# EAGLE board dis12824d_v1 (EAGLE 9.5.1)
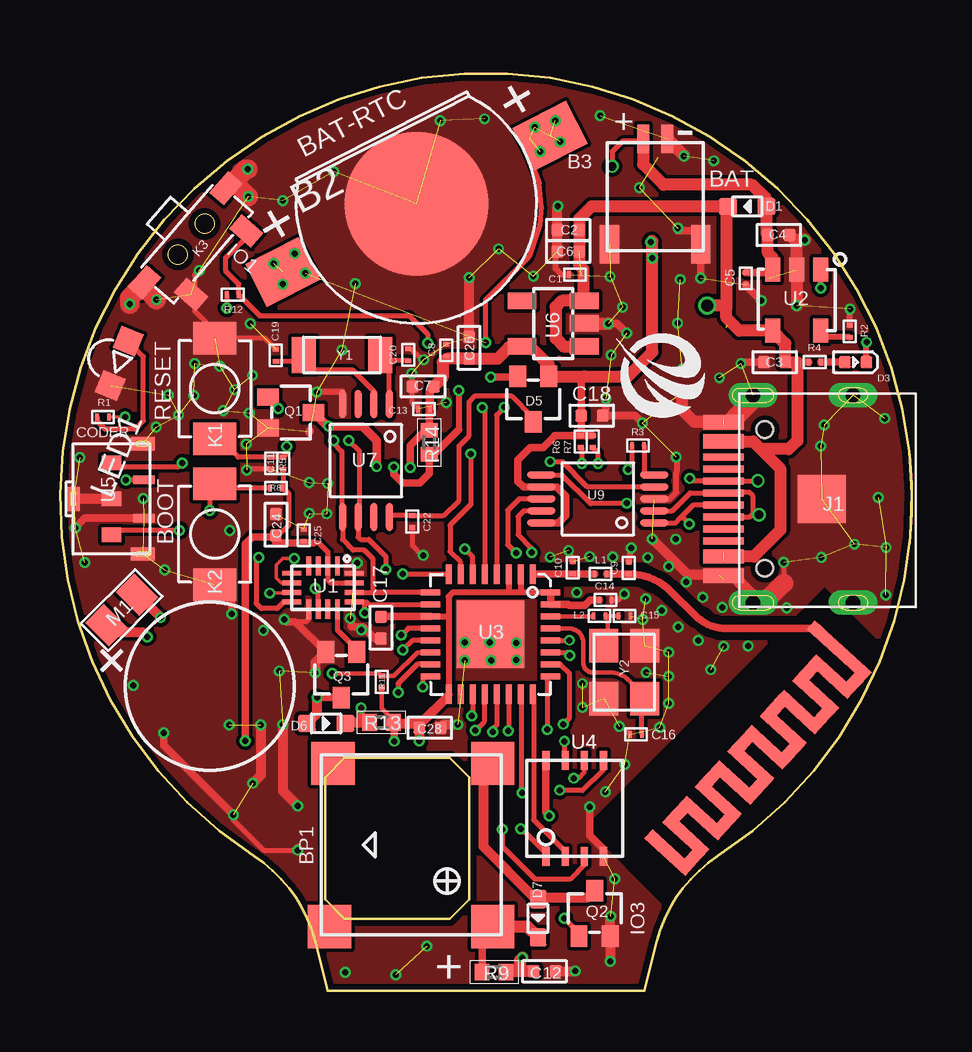
[diagram p0: board, top side]
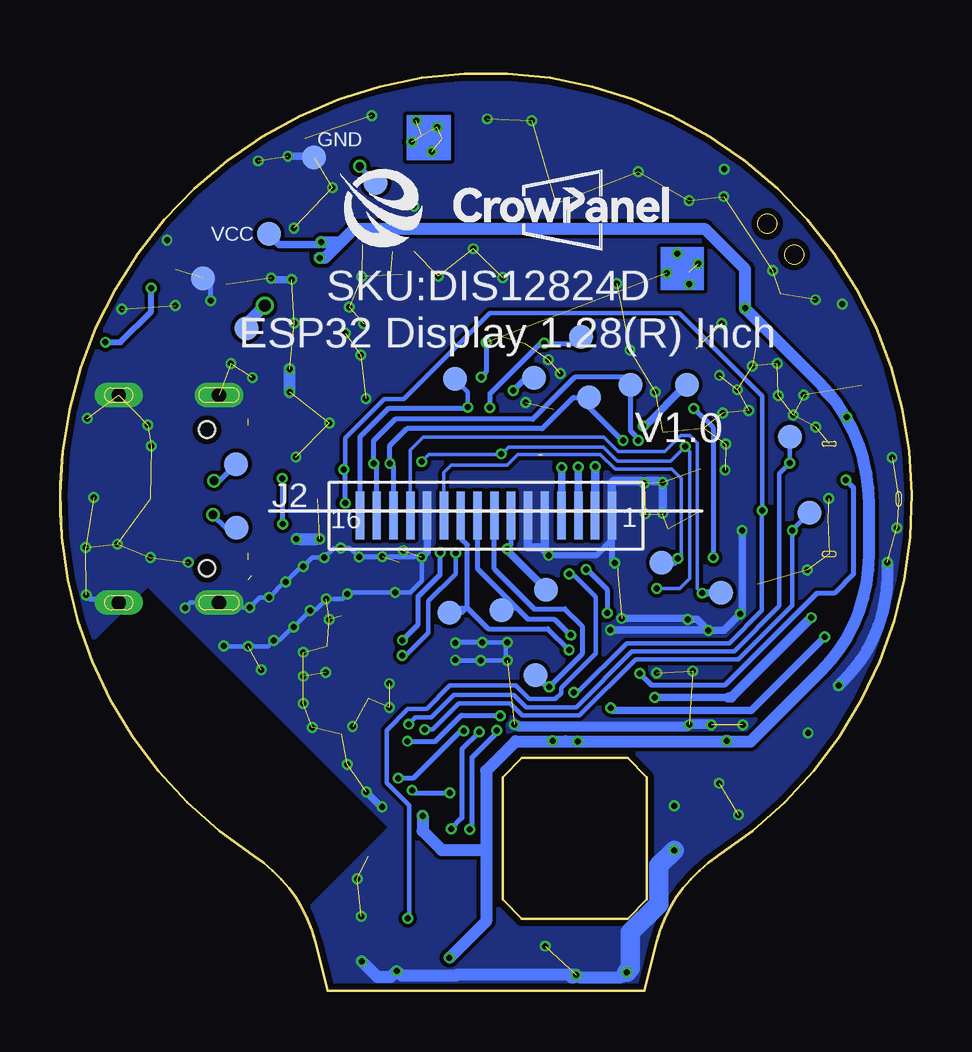
[diagram p1: board, bottom side, seen from below]

Size 35.5 x 38.23 mm. Coordinates in mm from the lower left corner, seen from the top.
Outline: 35.4,18.65 arc12 35.4,22.34
Outline: 11.15,0 24.35,0 24.86,2.05 arc-43 27.41,5.61 arc294 8.08,5.61 arc-43 10.63,2.05 11.15,0
Outline: 11.85,3 16.25,3 17.05,3.8 17.05,8.9 16.25,9.7 11.85,9.7 11.05,8.9 11.05,3.8 11.85,3
Copper layers (1*16): Top 0.035mm / dielectric 1.5mm / Bottom 0.035mm
Design rules "default *": minimum track width 6mil, minimum drill 0.35mm, track to track 6mil, track to pad 6mil, pad to pad 6mil, via to via 6mil, smd to smd 6mil, copper to edge 10mil, drill to drill 6mil, minimum pad ring 4mil, minimum via ring 4mil, stop-mask expansion 4mil, vias tented up to drill 10mil, thermal gap 10mil
tRestrict: 15 lines

## Footprints (pad centres in the part's own frame; a part is rotated, then mirrored left to right if it is on the bottom)
ANT-2.4G_1 = smd 0.5 x 3.2: 1 0,1.6 | smd 0.5 x 2.2: P$1 1,2.1; P$4 2,2.1; P$5 3,2.1; P$6 4,2.1; P$7 5,2.1; P$8 6,2.1; P$9 7,2.1; P$10 8,2.1; P$15 9,2.1; P$16 10,2.1 | smd 1 x 0.5: P$2 0.5,2.95; P$3 1.5,1.25; P$11 3.5,1.25; P$12 5.5,1.25; P$13 2.5,2.95; P$14 4.5,2.95; P$18 7.5,1.25; P$19 9.5,1.25; P$20 6.5,2.95; P$21 8.5,2.95; P$22 10.5,2.95 | smd 0.5 x 2.3: P$17 11,2.05
POWER-BAT = smd 6 x 6: 1 0,0 | smd 2.5 x 2: 2 -6.254,0; 3 6.254,0
SH1.0MM-W = smd 0.5 x 1.2: 1 -0.5,2.4; 2 0.5,2.4 | smd 0.8 x 1.6: 3 -1.9,-2; 4 1.9,-2
BEEP_7525 = smd 1.8 x 1.8: 1 3.4,-3.4; 2 3.4,3.4; 3 -3.25,3.4; 4 -3.4,-3.4
0201_W = smd 0.2 x 0.3: 1 -0.25,0; 2 0.25,0
0402 = smd 0.5 x 0.5: 1 -0.45,0; 2 0.45,0
SOD-523 = smd 0.762 x 0.7: + -0.8,0; - 0.8,0
LED-0402_W = smd 0.5 x 0.5: 1 -0.45,0; 2 0.45,0
SOT-323_W = smd 0.7 x 0.9: 1 -0.65,-0.95; 2 0.65,-0.95; 3 0,0.95
KEVIN_3.0TYPEC-SMD = smd 0.3 x 1.7: A1 -3.35,0.5; A4 -2.55,0.5; A5 -1.25,0.5; A6 -0.25,0.5; A7 0.25,0.5; A8 1.25,0.5; A9 2.55,0.5; A12 3.35,0.5; B1 3.05,0.5; B4 2.25,0.5; B5 1.75,0.5; B6 0.75,0.5; B7 -0.75,0.5; B8 -1.75,0.5; B9 -2.25,0.5; B12 -3.05,0.5 | drill 0.6 pad 1.016 long: P$1 -4.325,-0.72; P$2 4.325,-0.72; P$3 -4.325,-4.9; P$4 4.325,-4.9 | smd 2 x 2: P$5 0,-3.597 | hole 0.68: -2.89,-1.22; 2.89,-1.22
16PIN-SMD = smd 0.35 x 2: 1 -5.25,0; 2 -4.55,0; 3 -3.85,0; 4 -3.15,0; 5 -2.45,0; 6 -1.75,0; 7 -1.05,0; 8 -0.35,0; 9 0.35,0; 10 1.05,0; 11 1.75,0; 12 2.45,0; 13 3.15,0; 14 3.85,0; 15 4.55,0; 16 5.25,0
KEY-3X4_W = smd 1.35 x 1.8: 1 -2.1,0; 2 2.1,0
KEY-3.5X4.5_C = smd 1.2 x 0.8: 1 -2.56,-0.8; 2 2.64,-0.8 | smd 0.8 x 1.2: 3 1.74,1; 4 -1.76,1
LED-0603-CE = smd 1 x 1: 1 -1,0; 2 1,0
MOTOR-1 = smd 1.1 x 1.4: 1 -0.9,0; 2 0.9,0
PAD-1.0MM = smd 1 x 1: P$1 0,0
R0402 = smd 0.6 x 0.7: 1 -0.5,0; 2 0.5,0
UQFN-16 = smd 0.2 x 0.8: 1 -0.6,-0.9; 2 -0.2,-0.9; 3 0.2,-0.9; 4 0.6,-0.9; 9 0.6,0.9; 10 0.2,0.9; 11 -0.2,0.9; 12 -0.6,0.9 | smd 0.8 x 0.2: 5 1.3,-0.6; 6 1.3,-0.2; 7 1.3,0.2; 8 1.3,0.6; 13 -1.3,0.6; 14 -1.3,0.2; 15 -1.3,-0.2; 16 -1.3,-0.6
SOP23-5 = smd 1 x 0.635: 1 -1.27,1; 2 -1.27,0; 3 -1.27,-1; 4 1.27,-1; 5 1.27,1
QFN-32_W = smd 0.8 x 0.25: 1 -2.5,1.75; 2 -2.5,1.25; 3 -2.5,0.75; 4 -2.5,0.25; 5 -2.5,-0.25; 6 -2.5,-0.75; 7 -2.5,-1.25; 8 -2.5,-1.75; 17 2.5,-1.75; 18 2.5,-1.25; 19 2.5,-0.75; 20 2.5,-0.25; 21 2.5,0.25; 22 2.5,0.75; 23 2.5,1.25; 24 2.5,1.75 | smd 0.25 x 0.8: 9 -1.75,-2.5; 10 -1.25,-2.5; 11 -0.75,-2.5; 12 -0.25,-2.5; 13 0.25,-2.5; 14 0.75,-2.5; 15 1.25,-2.5; 16 1.75,-2.5; 25 1.75,2.5; 26 1.25,2.5; 27 0.75,2.5; 28 0.25,2.5; 29 -0.25,2.5; 30 -0.75,2.5; 31 -1.25,2.5; 32 -1.75,2.5 | smd 2.8 x 2.8: 33 0,0
XSON4X4 = smd 0.8 x 0.3: 1 -2,1.2; 2 -2,0.4; 3 -2,-0.4; 4 -2,-1.2; 5 2,-1.2; 6 2,-0.4; 7 2,0.4; 8 2,1.2
E5A5-23-12-8 = smd 1 x 0.55: 1 0,-1.6 | smd 0.55 x 1: 2 2.3,1.3; 3 -2.3,1.3 | smd 0.6 x 0.8: A -1.5,0; B 1.5,0; C 0,0 | smd 0.35 x 0.9: D -0.8,1.35; E 0.8,1.35
SOT23-5_W = smd 0.69 x 1.2: 1 -0.95,-1.3; 2 0,-1.3; 3 0.95,-1.3; 4 0.95,1.3; 5 -0.95,1.3
MSOP-8_W = smd 1.2 x 0.3: 1 -2.35,0.975; 2 -2.35,0.325; 3 -2.35,-0.325; 4 -2.35,-0.975; 5 2.35,-0.975; 6 2.35,-0.325; 7 2.35,0.325; 8 2.35,0.975
MSOP-10_W = smd 1.2 x 0.3: 1 -2.35,1; 2 -2.35,0.5; 3 -2.35,0; 4 -2.35,-0.5; 5 -2.35,-1; 6 2.35,-1; 7 2.35,-0.5; 8 2.35,0; 9 2.35,0.5; 10 2.35,1
3215_W = smd 1 x 1.5: 1 -1.6,0; 2 1.6,0
3225_W = smd 1.4 x 1.2: 1 -1.1,-0.85; 2 1.1,-0.85; 3 1.1,0.85; 4 -1.1,0.85

## Placement (x,y rotation side)
A1  ANT-2.4G_1  [ANT-2.4G_1]  31.29,15.25 227.5 top
B2  CR927纽扣电池座  [POWER-BAT]  14.85,32.8 207 top
B3  BAT-1.0MM-W  [SH1.0MM-W]  24.8,33.11 0 top
BP1  BEEP_7525  [BEEP_7525]  14.63,6.07 0 top
C1  0.1uF  [0201_W]  21.46,29.86 180 top
C2  10uF  [0402]  21.18,31.71 180 top
C3  10uF  [0402]  29.78,26.2 180 top
C4  10uF  [0402]  29.95,31.5 0 top
C5  0.1uF  [0201_W]  28.57,29.69 270 top
C6  10uF  [0402]  21.18,30.81 180 top
C7  10uF  [0402]  15.13,25.19 180 top
C8  0.1uF  [0201_W]  16.09,26.7 90 top
C9  NC  [0201_W]  23.7,17.62 90 top
C10  NC  [0201_W]  21.37,17.63 90 top
C11  0.1uF  [0201_W]  8.8,21.99 270 top
C12  10uF  [0402]  20.19,0.81 0 top
C13  0.1uF  [0201_W]  15.17,24.24 180 top
C14  0.1uF  [0201_W]  22.73,16.28 0 top
C15  12pF  [0201_W]  23.53,15.62 0 top
C16  20pF  [0201_W]  24,10.69 180 top
C17  10uF  [0402]  13.37,15.13 270 top
C18  10uF  [0402]  22.16,23.97 0 top
C19  18pF  [0201_W]  9,26.49 90 top
C20  18pF  [0201_W]  14.51,26.51 90 top
C22  0.1uF  [0201_W]  14.68,19.56 270 top
C24  10uF  [0402]  9,19.42 90 top
C25  0.1uF  [0201_W]  10.16,18.99 90 top
C26  10uF  [0402]  17.05,26.8 90 top
C28  10uF  [0402]  15.41,10.96 0 top
D1  B5819WT  [SOD-523]  28.64,32.69 180 top
D3  LED0402_红色  [LED-0402_W]  33.15,26.2 0 top
D5  BAT54CW_W  [SOT-323_W]  19.72,24.66 180 top
D6  1N4148WT  [SOD-523]  11.09,11.14 0 top
D7  1N4148WT  [SOD-523]  19.92,3.02 270 top
J1  TYPEC-3.0-16P  [KEVIN_3.0TYPEC-SMD]  28.15,20.5 90 top
J2  0128B004-G1I0112  [16PIN-SMD]  17.75,19.8 180 bottom
K1  3*4*2mm  [KEY-3X4_W]  6.45,25.1 270 top
K2  3*4*2mm  [KEY-3X4_W]  6.45,19.03 90 top
K3  侧贴 2*4*3.5mm  [KEY-3.5X4.5_C]  5.85,31 229 top
L1  0R  [0201_W]  22.53,17.38 180 top
L2  24nH  [0201_W]  22.48,15.63 0 top
LED1  LED0603CT  [LED-0603-CE]  2.47,26.15 248 top
M1  MTOR_0720  [MOTOR-1]  2.57,15.87 45 top
P1  [PAD-1.0MM]  5.09,23.09 0 bottom
P2  [PAD-1.0MM]  4.26,19.92 0 bottom
P3  [PAD-1.0MM]  15.69,13.16 0 bottom
P4  [PAD-1.0MM]  17.11,15.87 0 bottom
P5  [PAD-1.0MM]  19.27,15.75 0 bottom
P6  [PAD-1.0MM]  13.46,24.73 0 bottom
P7  [PAD-1.0MM]  11.73,25.25 0 bottom
P8  [PAD-1.0MM]  27.73,27.61 0 bottom
P9  [PAD-1.0MM]  28.16,21.95 0 bottom
P10  [PAD-1.0MM]  19.05,25.5 0 bottom
P11  [PAD-1.0MM]  26.8,31.55 0 bottom
P12  [PAD-1.0MM]  24.91,34.73 0 bottom
P13  [PAD-1.0MM]  10.43,17.84 0 bottom
P14  [PAD-1.0MM]  15.24,16.72 0 bottom
P15  [PAD-1.0MM]  7.95,16.59 0 bottom
P16  [PAD-1.0MM]  9.38,25.26 0 bottom
P17  [PAD-1.0MM]  15.74,25.54 0 bottom
P18  [PAD-1.0MM]  28.14,19.31 0 bottom
P19  [PAD-1.0MM]  22.35,33.68 0 bottom
P20  [PAD-1.0MM]  13.79,27.26 0 bottom
P21  [PAD-1.0MM]  29.53,29.69 0 bottom
Q1  HXY2102EI  [SOT-323_W]  9.62,24.1 270 top
Q2  HXY2102EI  [SOT-323_W]  22.28,3.23 0 top
Q3  HXY2102EI  [SOT-323_W]  11.72,13.17 180 top
R1  4.7K  [0201_W]  1.8,23.92 180 top
R2  2K  [0201_W]  32.9,27.49 90 top
R3  10K  [0201_W]  24.09,22.73 180 top
R4  4.7K  [0201_W]  31.45,26.2 0 top
R5  10K  [0201_W]  9.3,21.99 90 top
R6  10K  [0201_W]  21.7,22.89 270 top
R7  10K  [0201_W]  22.2,22.89 270 top
R8  10K  [0201_W]  9,20.96 180 top
R9  [R0402]  18.09,0.78 180 top
R11  10K  [0201_W]  13.4,12.87 90 top
R12  10K  [0201_W]  7.2,29.01 0 top
R13  3R  [R0402]  13.39,11.18 180 top
R14  [R0402]  15.39,22.86 270 top
U1  PI4IOE5V6408ZTAEX  [UQFN-16]  10.96,16.8 180 top
U2  TP4054  [SOP23-5]  30.7,28.78 270 top
U3  ESP32-C3FH4  [QFN-32_W]  17.94,14.86 270 top
U4  W25Q64JVXGIQ  [XSON4X4]  21.45,7.6 90 top
U5  E5A5-23-12-8  [E5A5-23-12-8]  2.15,20.5 270 top
U6  RT9013-30PB  [SOT23-5_W]  20.55,27.81 90 top
U7  BM8563EMA  [MSOP-8_W]  12.75,22.1 270 top
U9  CH340X  [MSOP-10_W]  22.41,20.5 180 top
Y1  32.768KHZ  [3215_W]  11.75,26.5 180 top
Y2  40MHz  [3225_W]  23.51,13.28 270 top

## Library data of the parts
A1 B3 BP1 C1-C20 C22 C24-C26 C28 D1 D3 D5-D7 J2 K1-K3 L1 L2 M1 Q1-Q3 R1-R8 R11 R12 U1 U3 U4 U6 U7 U9 Y1 Y2 = WGH
B2 LED1 = rcl
J1 = untitled
P1-P21 = crowpi_pow
R9 R13 R14 = rcl; SPICEPREFIX: R
U2 = DFN8
U5 = WGH; SPICEPREFIX: X

## Nets
32I: C20.1 U7.1 Y1.1
32O: C19.1 U7.2 Y1.2
A_IO19: P1.P$1 U3.26 U5.A
ANT: C10.1 L1.2 U3.1
B_IO18: P2.P$1 U3.25 U5.B
BEEP_IO3: Q2.1 U3.8
BEEP_VCC: BP1.1 D7.- R9.2
BOOT_IO9: K2.2 R3.2 R8.2 U3.15 U9.6
CHRG: D3.2 U2.1
D+: J1.A6 J1.B6 P9.P$1 U9.1
D-: J1.A7 J1.B7 P18.P$1 U9.2
ENC_IO8: R11.2 U3.14 U5.D
GND: B2.1 B3.2 B3.3 B3.4 C1.2 C2.2 C3.2 C4.2 C5.2 C6.2 C7.2 C8.2 C9.2 C10.2 C11.2 C12.2 C13.2 C14.2 C15.2 C16.2 C17.2 C18.2 C19.2 C20.2 C22.2 C24.2 C25.2 C26.2 C28.2 J1.A1 J1.A12 J1.B1 J1.B12 J1.P$1 J1.P$2 J1.P$3 J1.P$4 J1.P$5 J2.1 J2.5 J2.6 J2.12 K1.1 K2.1 K3.3 LED1.2 P12.P$1 P21.P$1 Q1.2 Q2.2 Q3.2 R2.2 U1.9 U1.16 U2.2 U3.33 U4.4 U5.1 U5.2 U5.3 U5.C U5.E U6.2 U7.4 U9.3 Y2.2 Y2.4
KEY_IO1: K3.4 P20.P$1 R12.2 U3.5
LCD-CS_IO10: J2.8 P3.P$1 U3.16
LCD-D/C_IO2: J2.7 P14.P$1 U3.6
LCD-MOSI_IO7: J2.10 P5.P$1 U3.13
LCD_RESET: J2.11 P13.P$1 U1.6
LED_P2: Q1.1 U1.8
LEDA: J2.3 P17.P$1 R14.2
LEDK: J2.2 P16.P$1 Q1.3
MOTOR_P0: Q3.1 U1.12
MTOR_VCC: D6.- M1.1 R13.2
N$2: LED1.1 R1.2
N$3: R2.1 U2.5
N$4: C15.1 L2.2 Y2.1
N$5: R3.1 U9.5
N$6: D3.1 R4.2
N$7: BP1.2 D7.+ Q2.3
N$8: D6.+ M1.2 Q3.3
N$9: A1.1 C9.1 L1.1
N$10: B2.2 B2.3 D5.2
PI4-INT_IO3: U1.1
RESET: C11.1 K1.2 R5.2 U1.10 U3.7 U9.4
RXD_IO20: U3.27 U9.8
SCL_IO5: J2.14 P6.P$1 R6.2 U1.13 U3.10 U7.6
SDA_IO4: J2.15 P7.P$1 R7.2 U1.14 U3.9 U7.5
SPICLK: U3.22 U4.6
SPICLK_IO6: J2.9 P4.P$1 U3.12
SPICS0: U3.21 U4.1
SPID: U3.23 U4.5
SPIHD: U3.19 U4.7
SPIQ: U3.24 U4.2
SPIWP: U3.20 U4.3
TP-INT_IO0: J2.16 P10.P$1 U3.4
TP_RESET: J2.13 P15.P$1 U1.7
TXD_IO21: U3.28 U9.9
VBAT: B3.1 C4.1 C5.1 D1.+ P19.P$1 U2.3
VBUS: C1.1 C2.1 C3.1 C6.1 D1.- J1.A4 J1.A9 J1.B4 J1.B9 P8.P$1 R4.1 U2.4 U6.1 U6.3
VCC: C7.1 C8.1 C12.1 C13.1 C14.1 C17.1 C18.1 C24.1 C25.1 C26.1 C28.1 D5.1 J2.4 P11.P$1 R1.1 R5.1 R6.1 R7.1 R8.1 R9.1 R11.1 R12.1 R13.1 R14.1 U1.2 U1.15 U3.2 U3.3 U3.11 U3.17 U3.31 U3.32 U4.8 U6.5 U9.7 U9.10
VDD_RTC: C22.1 D5.3 U7.8
VDD_SPI: U3.18
XTAL_N: C16.1 U3.29 Y2.3
XTAL_P: L2.1 U3.30

## Tracks (layer width: path | path; a pad name or v marks a point on that pad's centre or on a via)
32I
  Top 0.2: U7.1 13.72,25.91 13.3,26.34 | 13.64,26.89 13.37,26.62 13.42,26.57 | 13.42,26.57 Y1.1 | 13.72,26.27 13.59,26.41 13.42,26.57
  Top 0.203: C20.1 13.74,26.26 13.59,26.41
  Top 0.305: Y1.1 13.35,26.39 13.3,26.34
32O
  Top 0.2: U7.2 13.07,25 12.19,25.88 10.57,25.88 10.15,26.3 Y1.2 9.89,26.24 C19.1
A_IO19  (via drill 0.25)
  Top 0.203: U3.26 20.85,13.61 21.21,13.25 21.21,11.35 v20.97,11.11 | v5.09,21.99 4.92,21.82 2.33,21.82 U5.A
  Bottom 0.178: v20.97,11.11 20.69,11.39 20.04,11.39 19.1,12.33 16.59,12.33 16.08,11.82 14,11.82 11.67,14.15 7.4,14.15 5.52,16.03 5.52,21.56 v5.09,21.99 P1.P$1
  Bottom 0.203: v20.97,11.11 20.98,11.1
ANT
  Top 0.254: U3.1 arc-90 19.71,17.38
  Top 0.305: 19.71,17.38 C10.1 L1.2
B_IO18  (via drill 0.25)
  Top 0.203: U3.25 20.3,12.97 v20.3,10.88 | v4.98,19.19 2.34,19.19 U5.B
  Bottom 0.178: v20.3,10.88 19.97,10.88 18.88,11.97 16.74,11.97 16.24,11.47 13.85,11.47 11.5,13.82 7.23,13.82 4.98,16.07 v4.98,19.19 | v4.98,19.19 | v4.98,19.19 v4.98,19.2 P2.P$1
BEEP_IO3  (via drill 0.25)
  Top 0.2: U3.8 v14.29,17.36 v14.28,17.37 | v21.01,3.02 21.63,2.4 Q2.1
  Bottom 0.178: v14.28,17.37 14.14,17.37 13.17,16.4 13.17,14.06 14.62,12.61 14.62,12.4 14.86,12.16 15.95,12.16 16.51,12.72 19.25,12.72 20.23,11.75 21,11.75 21.89,10.86 21.89,8.67 20.95,7.73 20.95,3.08 v21.01,3.02
BEEP_VCC
  Top 0.305: BP1.1 17.59,2.23 R9.2
  Top 0.508: D7.- 19.47,2.67 BP1.1
BOOT_IO9  (via drill 0.25)
  Top 0.203: U9.6 20.91,21.5 22.11,20.3 23.6,20.3 v23.62,20.32 | v23.67,21.73 23.84,21.9 R3.2 | R8.2 6.62,20.96 K2.2 6.24,20.92 v6.24,20.02 | U3.15 14.91,13.62 14.09,12.8 v14.09,12.43
  Bottom 0.178: v14.09,12.43 13.94,12.43 11.89,14.48 7.61,14.48 6.25,15.84 v6.25,20.01 v6.24,20.02 6.24,24.79 9.69,28.24 17.6,28.24 21.17,24.67 21.99,24.67 23.62,23.05 23.62,21.68
  Bottom 0.203: v23.62,20.32 23.62,21.68 v23.67,21.73
CHRG  (via drill 0.25)
  Top 0.254: D3.2 v33.6,27.02 v33.6,27.03 | v31.7,29.29 U2.1
  Bottom 0.254: v33.6,27.03 32.98,27.03 31.7,28.31 v31.7,29.29
D+  (via drill 0.25, 0.35)
  Top 0.2: U9.1 25.65,19.5 25.84,19.7 | 25.84,19.7 26.41,20.26 J1.A6 | v26.24,21.36 26.35,21.25 J1.B6 29.01,21.25 29.03,21.24 29.05,21.24 v29.08,21.26 | v26.22,19.46 25.98,19.7 25.84,19.7
  Bottom 0.2: v26.24,21.36 26.24,19.48 v26.22,19.46 | 27.9,21.95 P9.P$1 28.85,21.26 v29.08,21.26
D-  (via drill 0.35)
  Top 0.2: U9.2 25.51,20 26.26,20.75 J1.A7 27.67,20.77 28.73,20.77 28.88,20.62 28.88,19.89 | J1.B7 28.74,19.75 28.88,19.89 | 28.88,19.89 28.93,19.84 v29.13,19.84 29.15,19.84
  Bottom 0.2: v29.13,19.84 28.59,19.31 P18.P$1
ENC_IO8  (via drill 0.25)
  Top 0.178: U3.14 14.9,14.11 13.91,13.12 R11.2 13.29,13.23 v11.34,13.23
  Top 0.2: U5.D v2.75,21.29
  Top 0.203: U3.14 15.42,14.09
  Bottom 0.2: v2.75,21.29 2.44,20.98 | 3.96,16.57 7.77,12.75 10.86,12.75 v11.34,13.23
  Bottom 0.203: 2.44,20.98 2.44,17.37 3.24,16.57 3.96,16.57
GND  (via drill 0.25)  (108 unrouted)
  Top 0.152: J1.A1 27.65,17.25
  Top 0.2: v12.39,17.83 12.41,17.83 12.44,17.8 12.26,17.63 | 27.51,23.71 J1.A12 28.1,23.85 | J1.B12 27.5,17.3 | C16.2 23.42,11.02 v23.31,11.02 | 28.87,24.62 J1.P$2 | v30.16,17.86 30.16,16.99
  Top 0.203: U1.9 10.36,15.49 10.25,15.38 9.44,15.38 v9.35,15.47 | v17.96,13.76 17.96,14.84 U3.33 17.94,14.54 v17.91,14.51 | C20.2 14.61,26.76 15.06,26.3 v15.15,26.3 | C13.2 14.68,24.48 C7.2 14.68,25.7 v14.65,25.73 | v23.52,16.54 23.26,16.28 C14.2 | C19.2 8.54,27.2 K1.1 6.6,27.35 5.61,28.34 5.61,29.82 v5.8,30.01 | C11.2 7.82,21.74 v7.79,21.71 | v7.23,7.33 7.23,7.11 8.48,5.86 9.76,5.86 v9.91,5.86 | v15.13,18.15 15.1,18.15 14.68,18.57 C22.2
  Top 0.254: U9.3 25.41,20.5 25.68,20.77 25.68,21.61 25.69,21.62 25.69,22.22 v25.67,22.25 | R2.2 32.9,28.39 v32.92,28.41 | U7.4 11.77,24.96 v10.7,24.96 | C1.2 20.89,29.86 20.65,30.1 20.65,30.73 C6.2 | J1.B12 27.53,17.33 | 9.91,6.01 9.76,5.86 | C9.2 v23.8,18.46 | C10.2 v21.19,18.34
  Top 0.305: U5.E 1.04,19.7 v0.63,19.29 | C3.2 28.43,26.2 v28.37,26.14 | C5.2 28.57,29.41 v29.22,28.76 | U4.4 22.65,5.9 22.08,6.47 v22.08,7.67 | v22.85,27.8 23.22,27.8 v23.61,27.41 | v22.75,24.68 22.75,24.11 C18.2 23.97,23.97 v24.27,23.67 | v7.23,7.33 4.33,10.23 v4.33,10.74 | v25.75,31.79 25.75,31.68 26.54,31.68 26.7,31.52 B3.4 v26.7,29.7 | C17.2 13.12,14.68 12.64,15.16 12.16,15.16 12.14,15.18 12.14,15.48 v12.09,15.53 | K2.1 7.16,16.22 v7.16,15.7 | Q3.2 9.81,15.38 9.44,15.38
  Top 0.35: 10.38,23.29 10.41,23.32
  Top 0.406: U5.C U5.1 | C26.2 v17.05,29.72 v17.04,29.72 | C6.2 C2.2 20.73,32.68 v20.75,32.7 | v22.95,3.1 22.93,3.08 Q2.2 v22.93,1.23 | Q3.2 10.64,13.69 v10.64,13.25 | 27.53,17.33 26.18,17.33 v24.68,18.83 | C12.2 v21.46,0.81 v21.47,0.82 | C28.2 15.99,11.09 v16.58,11.09 | v8.37,11.08 8.37,8.98 v8.04,8.65 | v9.29,11.09 9.29,8.32 v9.91,7.7
  Top 0.508: v30.69,28.56 v30.7,28.57 U2.2 30.7,31.2 C4.2 30.61,31.29 v31.04,31.29 | 27.51,23.71 26.43,23.71 25.93,24.21 v25.93,24.95 | 27.65,17.25 27.69,17.29 28.04,17.29 28.87,16.46 J1.P$1 29.65,16.18 | U6.2 v22.84,27.81 v22.85,27.8 | B3.2 26,34.81 v26,34.79
  Top 0.8: 28.87,24.62 28.1,23.85 | 30.16,16.99 29.35,16.18 J1.P$1
  Top 0.813: v4.02,28.8 3.41,29.41 2.9,28.9 v2.9,28.62 | v7.84,33.11 7.27,33.68 7.19,33.68 7.75,34.24 v7.82,34.24
  Bottom 0.178: 22.37,18.08 22.48,18.08 | v28.67,14.37 v28.66,14.36 v27.66,14.36 26.82,14.36 26.71,14.47 26.71,14.49 v26.6,14.6 26.36,14.6 25.8,15.16 v25.77,15.16 v25.76,15.17 v25.08,15.85 24.86,15.85 24.4,16.31 v24.4,16.33 23.72,16.33 23.54,16.51 23.54,16.52 v23.52,16.54 23.46,16.6 v21.54,16.6 20.89,16.6 20.42,17.07 v20.42,18.07 | v23.04,18.08 23.42,18.46 v23.8,18.46 24.08,18.46 v24.49,18.05 24.99,18.05 v25.36,17.68 25.44,17.68 v26.09,17.03 26.16,17.03 v26.79,16.4 27.18,16.4 v27.6,15.98 28.67,15.98 J1.P$1 30.06,16.18 v30.29,15.95 | v17.91,14.51 v16.86,14.51 16.93,14.44 16.93,13.77 | v16.87,13.77 16.93,13.77 | 16.93,13.77 v17.95,13.77 v17.96,13.76
  Bottom 0.2: v17.91,14.51 v19.01,14.51 v19.02,14.5 | v29.22,28.76 29.22,29.38 P21.P$1
  Bottom 0.203: v19.02,13.78 19,13.76 v17.96,13.76 | 22.48,18.08 v23.04,18.08 | 22.37,18.08 v20.43,18.08 v20.42,18.07 | J1.P$3 33.19,16.32 34.24,16.32 v34.41,16.49
  Bottom 0.254: J2.1 12.5,18.79 | 12.5,18.79 12.5,17.94 v12.39,17.83 | 12.5,18.79 13.14,18.15 v15.13,18.15
  Bottom 0.305: J2.12 20.2,18.29 v20.42,18.07 | v22.73,8.28 22.12,7.67 v22.08,7.67 | P12.P$1 24.97,34.79 v26,34.79 | v26.7,29.7 26.65,29.65 v25.84,29.65 | v12.09,15.53 9.4,15.53 v9.35,15.47 8.94,15.47 v8.48,15.01 | v8.48,15.01 7.85,15.01 v7.16,15.7 7.08,15.78 v7.08,19.18 | v12.56,15.04 8.5,15.04 v8.48,15.01
  Bottom 0.35: J2.1 12.5,21.17 12.43,21.24 10.38,21.24 10.38,19.86 | J2.5 15.3,18.48 | 15.3,18.48 15.3,18.32 v15.13,18.15 | J2.6 16,18.48 15.3,18.48
  Bottom 0.406: v8.37,11.08 v8.38,11.09 v9.29,11.09 9.36,11.02 16.42,11.02 16.49,11.09 v16.58,11.09
  Bottom 0.508: v25.65,18.82 v25.65,18.83 v24.68,18.83 | v25.93,24.95 v25.93,25.92 | v13.99,0.67 14.07,0.67 14.18,0.56 14.1,0.56 v13.99,0.67 | v13.99,0.67 18.94,0.67 18.98,0.63 21.28,0.63 v21.47,0.82 21.72,0.57 22.27,0.57 v22.93,1.23 | v13.99,0.67 13.88,0.56 12.1,0.56 v11.89,0.77 | v1.03,17.85 1.03,17.34 arc45 2.86,12.92 v3.06,12.72
  Bottom 0.813: v11.89,0.77 11.73,0.93 11.73,2.43 10.55,3.61 10.55,5.22 v9.91,5.86
  other vias: 4.36,17.54 25.36,14.11 11.75,26.7 3.47,20.52 9.29,32.94 18.27,30.93 9.14,13.32 6.8,24.19 0.83,22.23 16.09,24.51 23.11,4.66 27.24,34.59 15.28,1.86 10.39,21.19 10.39,19.9 22.5,36.47 24.99,10.98 23.53,9.44 31.73,18.06 31.7,22.7 34.1,20.56 17.69,36.34 15.85,36.27 11.41,34.14 23.44,28.5 22.96,26.5 22.07,18.09 24.42,13.26 21.77,12.8 24.28,15.47 27.12,13.38 25.36,13.11 5.61,26.14 12.31,29.48 25.73,27.82 7.76,22.79 7.88,24.08 8.02,25.65 19.73,29.78 25.36,11.98 34.36,23.86 34.42,18.48 27.48,25.55 31.84,23.58 33.1,18.61 22.92,29.77 21.77,11.81 11.11,19.88 4.51,24.83 5.57,24.81 6.66,26.04 7.93,27.81 11.16,21.15 7.27,25.05 4.94,23.99 4,23.5 7.05,11.08 24.14,33.47
  pour Top (no thermals): 25.25,3.27 21.69,6.83 31.86,17 36.25,12.62 36.25,39 -0.75,39 -0.75,-0.5 25.25,-0.5
  pour Bottom (no thermals): -1.25,39.5 -1.25,-1 25.75,-1 25.75,2.73 21.68,6.8 31.84,16.96 36.75,12.06 36.75,39.5
KEY_IO1  (via drill 0.25)
  Top 0.2: 8.32,28.14 R12.2 7.45,29.46 6.89,30.02 6.89,30.54 8.02,31.67
  Top 0.203: v17.59,24.31 17.69,24.21 U3.5 | 8.02,31.67 K3.4 | v15.32,27 15.32,27.38 14.56,28.14 8.32,28.14
  Bottom 0.2: v15.32,27 15.3,26.98 14.06,26.98 P20.P$1
  Bottom 0.203: v17.59,24.31 17.59,24.88 15.47,27 v15.32,27
LCD-CS_IO10  (via drill 0.25)
  Top 0.203: U3.16 15.12,13.11 v15.12,12.66
  Bottom 0.203: J2.8 17.4,17.58 15.74,15.92 14.46,15.92 13.74,15.2 13.74,14.03 v15.11,12.66 v15.12,12.66
  Bottom 0.254: P3.P$1 15.19,12.66 v15.12,12.66
LCD-D/C_IO2  (via drill 0.25)
  Top 0.203: U3.6 17.19,18.1 v16.87,18.42
  Bottom 0.203: v16.87,18.42 16.7,18.59 J2.7
  Bottom 0.305: v16.87,18.42 16.87,18.35 P14.P$1
LCD-MOSI_IO7  (via drill 0.25)
  Top 0.203: U3.13 14.7,14.61 v14.29,14.2
  Bottom 0.178: 18.53,15.98 18.76,15.75 P5.P$1 19.07,15.95 18.53,15.95
  Bottom 0.203: 18.53,15.98 18.53,18.59 18.8,18.86 J2.10 | 18.53,15.95 17.66,15.08 15.17,15.08 v14.29,14.2
LCD_RESET  (via drill 0.25)
  Top 0.152: v9.75,18.01 9.29,18.01 9.02,17.74 9.02,17.21 9.23,17 U1.6
  Bottom 0.152: J2.11 19.5,21.6 19.19,21.91 16.87,21.91 16.42,22.36 12.99,22.36 12.37,21.74 10,21.74 9.61,21.35 9.61,18.12 9.72,18.01 v9.75,18.01
  Bottom 0.305: P13.P$1 9.92,17.84 v9.75,18.01
LED_P2  (via drill 0.25)
  Top 0.203: U1.8 9.32,16.2 9.05,15.93 8.39,15.93 8.17,16.15 8.17,17.95 v8.28,18.06 | v9.09,24.27 8.67,24.69 Q1.1
  Bottom 0.203: v8.28,18.06 v8.29,18.07 8.29,23.47 v9.09,24.27
LEDA  (via drill 0.25)  (1 unrouted)
  Top 0.254: v16.62,25.01 v16.61,25 16.61,23.39
  Top 0.305: v13.9,21.82 13.9,21.55 14.28,21.16 14.99,21.16 15.39,21.56 R14.2 | 16.61,23.39 15.58,22.36
  Bottom 0.254: v16.62,25.01 16.09,25.54 P17.P$1
  Bottom 0.305: J2.3 v13.9,21.82 | 15.7,25.58 P17.P$1
LEDK  (via drill 0.25)
  Top 0.305: Q1.3 11.13,23.54 v11.19,23.54
  Top 0.35: v13.19,21.85 13.19,22.94 12.62,23.51 11.78,23.51 11.77,23.52 11.15,23.52 Q1.3
  Bottom 0.305: P16.P$1 9.4,25.26 11.12,23.54 v11.19,23.54
  Bottom 0.35: J2.2 v13.2,21.86 v13.19,21.85
MOTOR_P0
  Top 0.2: 11.56,15.44 11.56,15.04 12.37,14.23 Q3.1
  Top 0.203: U1.12 11.56,15.44
MTOR_VCC  (via drill 0.25)
  Top 0.305: 1.94,15.23 M1.1 2.1,15.23 | v12.54,11.79 12.54,11.22 12.59,11.18
  Top 0.406: 2.1,15.23 2.4,14.93 3.43,14.93 v3.63,14.74 | D6.- 11.93,11.18 12.59,11.18 R13.2
  Bottom 0.305: v3.63,14.74 6.69,11.68 12.46,11.68 12.52,11.74 12.52,11.77 v12.54,11.79
N$2
  Top 0.2: 3.48,26.44 LED1.1
  Top 0.203: 3.48,26.44 3.48,23.76 3.13,23.41 1.88,23.41 1.55,23.74 R1.2
N$3
  Top 0.254: R2.1 31.97,27.24 U2.5
N$4
  Top 0.178: 22.83,14.79 22.83,15.54 | C15.1 L2.2
  Top 0.203: 23.25,15.61 arc45 C15.1 | 22.83,14.79 arc-45 Y2.1 | 22.83,15.54 L2.2
N$5
  Top 0.203: U9.5 24.46,21.5 24.34,21.62 R3.1
N$6
  Top 0.305: R4.2 D3.1
N$7
  Top 0.406: Q2.3 21.98,3.88 19.98,3.88 D7.+ 19.82,3.92 19.73,3.92 17.65,6 17.65,9.09 BP1.2
N$8  (via drill 0.25)
  Top 0.305: Q3.3 v10.71,12.22 | 3.26,16.51 M1.2
  Top 0.406: M1.2 3.23,16.51 v4.19,15.55 | D6.+ 10.71,11.56 v10.71,12.22
  Bottom 0.305: v10.71,12.22 7.67,12.22 7.55,12.22
  Bottom 0.406: v4.19,15.55 7.52,12.22 7.67,12.22
N$9
  Top 0.305: L1.1 23.67,17.38 arc-45 C9.1 arc-45 25.46,16.64 26.46,15.64 arc45 27.79,15.09 31.47,15.09
  Top 0.406: 31.47,15.09 arc-45 31.62,15.03 32.46,14.19 arc-45 A1.1
N$10  (via drill 0.25)  (7 unrouted)
  Top 0.2: 19.55,30.61 19.99,31.91 20.05,32.7 19.97,33.66 19.35,35.3
  Top 0.203: v17.74,27.01 17.74,28.8 19.55,30.61 | v9.77,30.73 10.22,30.29 v10.22,29.91 9.73,29.91 v9.27,29.45 9.27,29.95 v8.91,30.3 9.34,30.3 v9.77,30.73
  Top 0.305: D5.2 19.04,25.58 v17.95,25.58 | 19.57,35.52 19.35,35.3
  Bottom 0.203: v17.95,25.58 17.74,25.79 v17.74,27.01
  other vias: 19.78,35.99 20.65,36.27 20.01,34.98 20.85,35.38
RESET  (via drill 0.25)
  Top 0.203: U9.4 21.98,21 20.93,22.05 v20.43,22.05 | U3.7 16.69,17.87 16.26,18.29 16.26,19.41 17.12,20.27 v17.12,22.38 | K1.2 6.66,23 7.42,22.24 C11.1 R5.2 9.45,22.39 v9.45,22.68 | U1.10 10.76,16.65 v10.64,16.77
  Bottom 0.152: v10.64,16.77 9.67,16.77 9.25,17.19 9.25,22.48 v9.45,22.68 10.04,22.09 12.29,22.09 12.86,22.66 16.79,22.66 17.08,22.38 v17.12,22.38 17.15,22.35 20.13,22.35 v20.43,22.05
  Bottom 0.203: v17.12,22.38 17.1,22.36
RXD_IO20  (via drill 0.25)
  Top 0.203: U3.27 21.14,14.11 21.24,14.01 v21.24,13.97 | v19.01,18.24 18.65,18.6 18.65,20.03 19.13,20.5 U9.8
  Bottom 0.178: v21.24,13.97 v21.23,13.98 21.09,13.98 20.15,14.92 20.15,16.24 19.01,17.38 v19.01,18.24
SCL_IO5  (via drill 0.25)
  Top 0.2: U1.13 12.7,16.2 | 12.7,16.2 12.78,16.2 12.87,16.11 U3.10 | v13.58,17.56 13.58,18.1 12.86,18.81 12.52,18.81 12.42,18.91 U7.6 12.46,19.79 12.46,22.52 v12.04,22.94 | v12.7,15.75 12.7,16.2
  Top 0.203: R6.2 21.75,22.59 v21.75,21.97
  Bottom 0.2: v13.58,17.56 13.54,17.56 12.7,16.72 v12.7,15.75 | v21.75,21.97 21.75,22.73 21.05,23.43
  Bottom 0.203: v21.75,21.97 21.62,21.88 21.62,20.52 J2.14 | 21.05,23.43 15.41,23.43 14.11,24.73 P6.P$1 13.46,24.32 12.08,22.94 v12.04,22.94
SDA_IO4  (via drill 0.25)
  Top 0.2: U7.5 11.77,18.8 12.2,18.37 12.68,18.37 13.04,18 13.04,16.61 U3.9 13.47,16.61 13.46,16.6 U1.14
  Top 0.203: v22.42,21.97 22.42,22.42 R7.2 | v11.4,22.93 11.4,22.83 11.74,22.48 11.74,19.78 U7.5
  Bottom 0.203: J2.15 22.3,21.96 v22.42,21.97 22.42,22.94 21.53,23.82 15.79,23.82 14.03,25.59 12.07,25.59 P7.P$1 11.73,23.35 11.4,23.02 v11.4,22.93 v11.41,22.93
SPICLK  (via drill 0.25)
  Top 0.178: U4.6 21.85,9.09 21.62,8.86 v21.41,8.86
  Top 0.2: U3.22 v18.69,10.84 v18.68,10.83
  Bottom 0.2: v21.41,8.86 21.39,8.88 20.75,8.88 18.8,10.83 v18.68,10.83
SPICLK_IO6  (via drill 0.25)
  Top 0.203: U3.12 14.51,15.11 v14.22,14.82
  Bottom 0.203: J2.9 18.1,17.59 16.49,15.98 17,15.98 P4.P$1 17.02,15.96 16.47,15.96 16,15.49 14.91,15.49 14.24,14.82 v14.22,14.82
SPICS0  (via drill 0.25)
  Top 0.2: U3.21 18.19,11.07 18.03,10.91 v18.03,10.79 | U4.1 20.25,5.75 19.25,6.75 v19.2,6.75
  Bottom 0.2: v18.03,10.79 18.75,10.07 18.75,7.2 v19.2,6.75
SPID  (via drill 0.25)
  Top 0.2: U3.23 19.21,12.34 19.21,8.29 v19.26,8.24 | U4.5 22.65,9.21 21.78,8.34 20.85,8.34 v20.83,8.36
  Bottom 0.2: v20.83,8.36 20.71,8.24 v19.26,8.24
SPIHD  (via drill 0.25)
  Top 0.2: U4.7 21.02,9.63 v21.02,10.4 | U3.19 17.19,11.49 v17.16,11.46
  Bottom 0.2: v21.02,10.4 19.86,10.4 18.78,11.48 17.18,11.48 v17.16,11.46
SPIQ
  Top 0.2: U4.2 21.05,5.81 19.74,7.12 19.74,12.31 U3.24
SPIWP  (via drill 0.25)
  Top 0.2: U4.3 21.85,5.24 21.26,4.65 19.8,4.65 18.45,6 18.45,6.71 v18.43,6.73 | v17.31,10.85 17.69,11.23 U3.20
  Bottom 0.2: v18.43,6.73 18.34,6.82 18.34,9.71 17.31,10.74 v17.31,10.85
TP-INT_IO0  (via drill 0.25)
  Top 0.203: v18.51,24.32 18.19,24 U3.4
  Bottom 0.178: v18.51,24.32 18.51,24.96 P10.P$1
  Bottom 0.203: v18.51,24.32 18.55,24.28 21.8,24.28 23,23.08 J2.16 | P10.P$1 19.29,25.74
  Bottom 0.305: P10.P$1 19.22,25.67
TP_RESET  (via drill 0.25)
  Top 0.152: U1.7 9.63,16.57 v8.74,16.57
  Bottom 0.152: J2.13 20.9,22.53 20.36,23.07 12.84,23.07 12.24,22.48 10.3,22.48 9.64,23.14 9.26,23.14 8.94,22.82 8.94,16.77 v8.74,16.57
  Bottom 0.305: P15.P$1 7.97,16.57 v8.74,16.57
TXD_IO21  (via drill 0.25)
  Top 0.203: U3.28 v21.23,14.61 | U9.9 19.33,20 19.09,19.76 19.09,19.01 19.66,18.44 v19.66,18.26
  Bottom 0.203: v19.66,18.26 19.66,17.35 20.59,16.42 20.59,15.25 v21.23,14.61 21.19,14.57
VBAT  (via drill 0.35)
  Top 0.2: B3.1 24.2,35.41 23.44,35.41 23.01,34.98 v23.01,34.37
  Top 0.305: C5.1 29.59,29.94 U2.3
  Top 0.508: U2.3 29.69,30.56 29.5,30.75 C4.1 29.44,31.56 D1.+ | 29.4,32.69 D1.+ | D1.+ 29.44,32.99 28.83,33.6 25.15,33.6 24.3,34.45 B3.1
  Bottom 0.2: v23.01,34.37 23.01,34.34 P19.P$1
VBUS  (via drill 0.5)  (3 unrouted)
  Top 0.152: J1.B9 27.8,18.1 | J1.A9 27.5,22.9
  Top 0.203: 27.77,32.69 D1.-
  Top 0.305: R4.1 C3.1 | J1.B4 | J1.B4 27.64,22.89 | J1.A9 27.65,22.77 J1.B4
  Top 0.5: 27.77,28.46 27.68,28.55 v26.97,28.55 | 21.63,32.18 C2.1 C6.1
  Top 0.508: 27.8,18.1 28.91,18.1 30.03,19.22 30.03,21.74 29.2,22.57 | 29.2,22.57 28.87,22.89 27.64,22.89 | 29.2,22.57 30.36,22.57 30.72,22.93 30.72,26.2 C3.1 30.23,26.98 U2.4 28.31,27.51 27.77,28.05 27.77,28.46 27.77,30.56 27.78,30.57 27.77,30.58 27.77,32.69 | D1.- 22.14,32.69 21.63,32.18 | C6.1 21.63,30.25 21.81,30.06 21.81,28.79 U6.3 20.91,28.76 20.65,28.5 20.65,27.2 20.99,26.86 U6.1
  Bottom 0.5: 27.77,27.75 v26.97,28.55
VCC  (via drill 0.25)
  Top 0.152: R1.1 v2.7,23.92 v2.71,23.91
  Top 0.178: R11.1 13.4,11.76 13.89,11.27 R13.1
  Top 0.2: R6.1 20.63,23.14 20.61,23.14 | U1.15 11.28,17 11.16,17.12 U1.2 11.16,18.3 10.79,18.67 10.55,18.67 | C8.1 16.95,26.45 C26.1 | C13.1 15.49,24.32 15.49,25.16 | R12.1 v6.95,28.46
  Top 0.203: 21.9,23.14 R6.1 | 9.3,20.96 9.55,20.71 9.55,19.42 9.1,18.97 C24.1 | 9.3,20.96 R8.1 | R5.1 9.3,20.96 | 24.67,31.25 24.66,31.25 | C25.1 10.16,18.67 10.16,18.66 | U3.17 16.19,12.19 C28.1
  Top 0.254: U3.32 19.19,16.61 | 19.19,16.61 18.69,16.61 | 18.69,16.61 16.37,16.61 16.19,16.43 16.19,15.6 | 16.19,15.6 U3.17 | U3.11 16.18,15.61 16.19,15.6 | U3.2 19.19,16.61 | U3.3 18.69,16.61
  Top 0.305: 10.16,18.66 9,18.66 C24.1 8.94,18.91 8.02,18.91 7.73,18.62 7.73,11.53 7.72,11.53 v7.72,10.41 | 10.55,18.67 10.16,18.67 | 20.63,23.14 20.13,22.63 19.58,22.63 19.08,22.13 19.08,21.23 19.32,20.99 U9.7 20.7,21 21.07,20.63 21.07,19.81 20.76,19.5 U9.10 | 20.61,23.14 21.9,23.14 R7.1 | D5.1 20.37,25.46 | 21.85,25.61 21.89,25.57 21.71,25.39 C18.1 R6.1 | v20.39,7.29 20.25,7.43 U4.8 | v14.6,21.81 14.6,22.73 15.23,23.36 R14.1 15.39,25 C7.1 | R9.1 18.62,0.81 19.17,0.81 | C17.1 13.4,15.61 U3.11 | U3.32 U3.31 21.17,16.11 21.23,16.05 21.87,16.05 22.1,16.28 C14.1 | U3.17 14.97,11.14 | 14.97,11.14 14.85,11.14 | C28.1 14.96,11.13 14.97,11.14 | 13.93,11.14 v13.93,10.4
  Top 0.35: 15.49,25.16 15.53,25.19 C7.1
  Top 0.406: C28.1 14.96,11.14 | v14.97,10.41 14.97,11.14 14.96,11.14 | R13.1 13.93,11.14 14.85,11.14 14.96,11.14
  Top 0.508: C7.1 15.94,25.55 15.94,26.18 16.1,26.35 C26.1 18.23,26.35 18.7,26.81 19.2,26.81 U6.5 19.59,26.86 20.37,26.08 D5.1 21.85,25.61 23.66,25.61 24.68,26.63 v24.68,30.54 24.68,31.23 24.66,31.25 | C12.1 19.17,0.81 | 19.17,0.81 18.59,0.81 | 19.17,0.81 19.17,1.28 v19.27,1.38
  Bottom 0.2: v14.97,10.41 14.96,10.4 14.44,10.4
  Bottom 0.203: 3.87,25.35 arc-45 3.67,24.87 v2.71,23.91
  Bottom 0.305: v20.39,7.29 20.39,6.57 19.63,5.81 17.74,5.81 | J2.4 v14.6,21.81 | P11.P$1 26.36,31.11 24.71,31.11 v24.61,31.2
  Bottom 0.508: v24.61,31.2 23.8,31.2 | v20.39,7.29 20.39,6.66 19.6,5.87 17.74,5.87 17.74,2.89 19.25,1.38 v19.27,1.38 | 17.74,5.81 17.74,9.17 16.51,10.4 14.44,10.4 7.69,10.4 7.7,10.41 v7.72,10.41 7.69,10.38 6.72,10.38 3.79,13.32 arc-45 1.79,18.15 1.79,20.33 arc-45 3.87,25.35 6.95,28.43 v6.95,28.46 6.95,30.07 8.64,31.76 23.24,31.76 23.8,31.2 | 23.8,31.2 24.46,30.54 v24.68,30.54 v24.69,30.54
VDD_RTC
  Top 0.2: 19.66,23.94 19.72,23.88 D5.3
  Top 0.203: U7.8 13.72,19.81 C22.1 16,19.81 16.63,20.44 16.63,22.71 17.05,23.13 17.05,24.54 17.31,24.8 18.8,24.8 19.66,23.94
XTAL_N
  Top 0.178: 24.09,12.54 24.21,12.54 | U3.29 21.19,15.11 arc-90 21.81,14.49 21.81,13.65 arc90 22.19,13.27 22.89,13.27 arc-90 24.07,12.09
  Top 0.203: 24.21,12.54 24.28,12.37 24.3,12.32 | 24.3,12.32 24.07,12.09 | 24.3,12.32 arc-45 Y2.3 24.25,12.07 C16.1
XTAL_P
  Top 0.178: L2.1 22.2,15.6 U3.30
(copper drawn outside any net)
  shapes: Bottom area x2

## Text on the board
tPlace: + | + | - | BAT-RTC | BAT | + | IO1 | CODER | RESET | BOOT | + | IO3 | +
bPlace: GND | VCC | SKU:DIS12824D | ESP32 Display 1.28(R) Inch | V1.0 | 16
tNames: U4
tValues: W25Q16JVUXIQ